# Altium PCB L293D.PcbDoc
Units mm, origin at the board's own origin, x right, y up, seen from the top; angles counter-clockwise.
Board outline 50 x 43 mm, 2 copper layers (Top Layer, Bottom Layer); 8 components, 10 nets, 34 pads, 1 vias.
Unrouted connection lines stored in the file: 3.
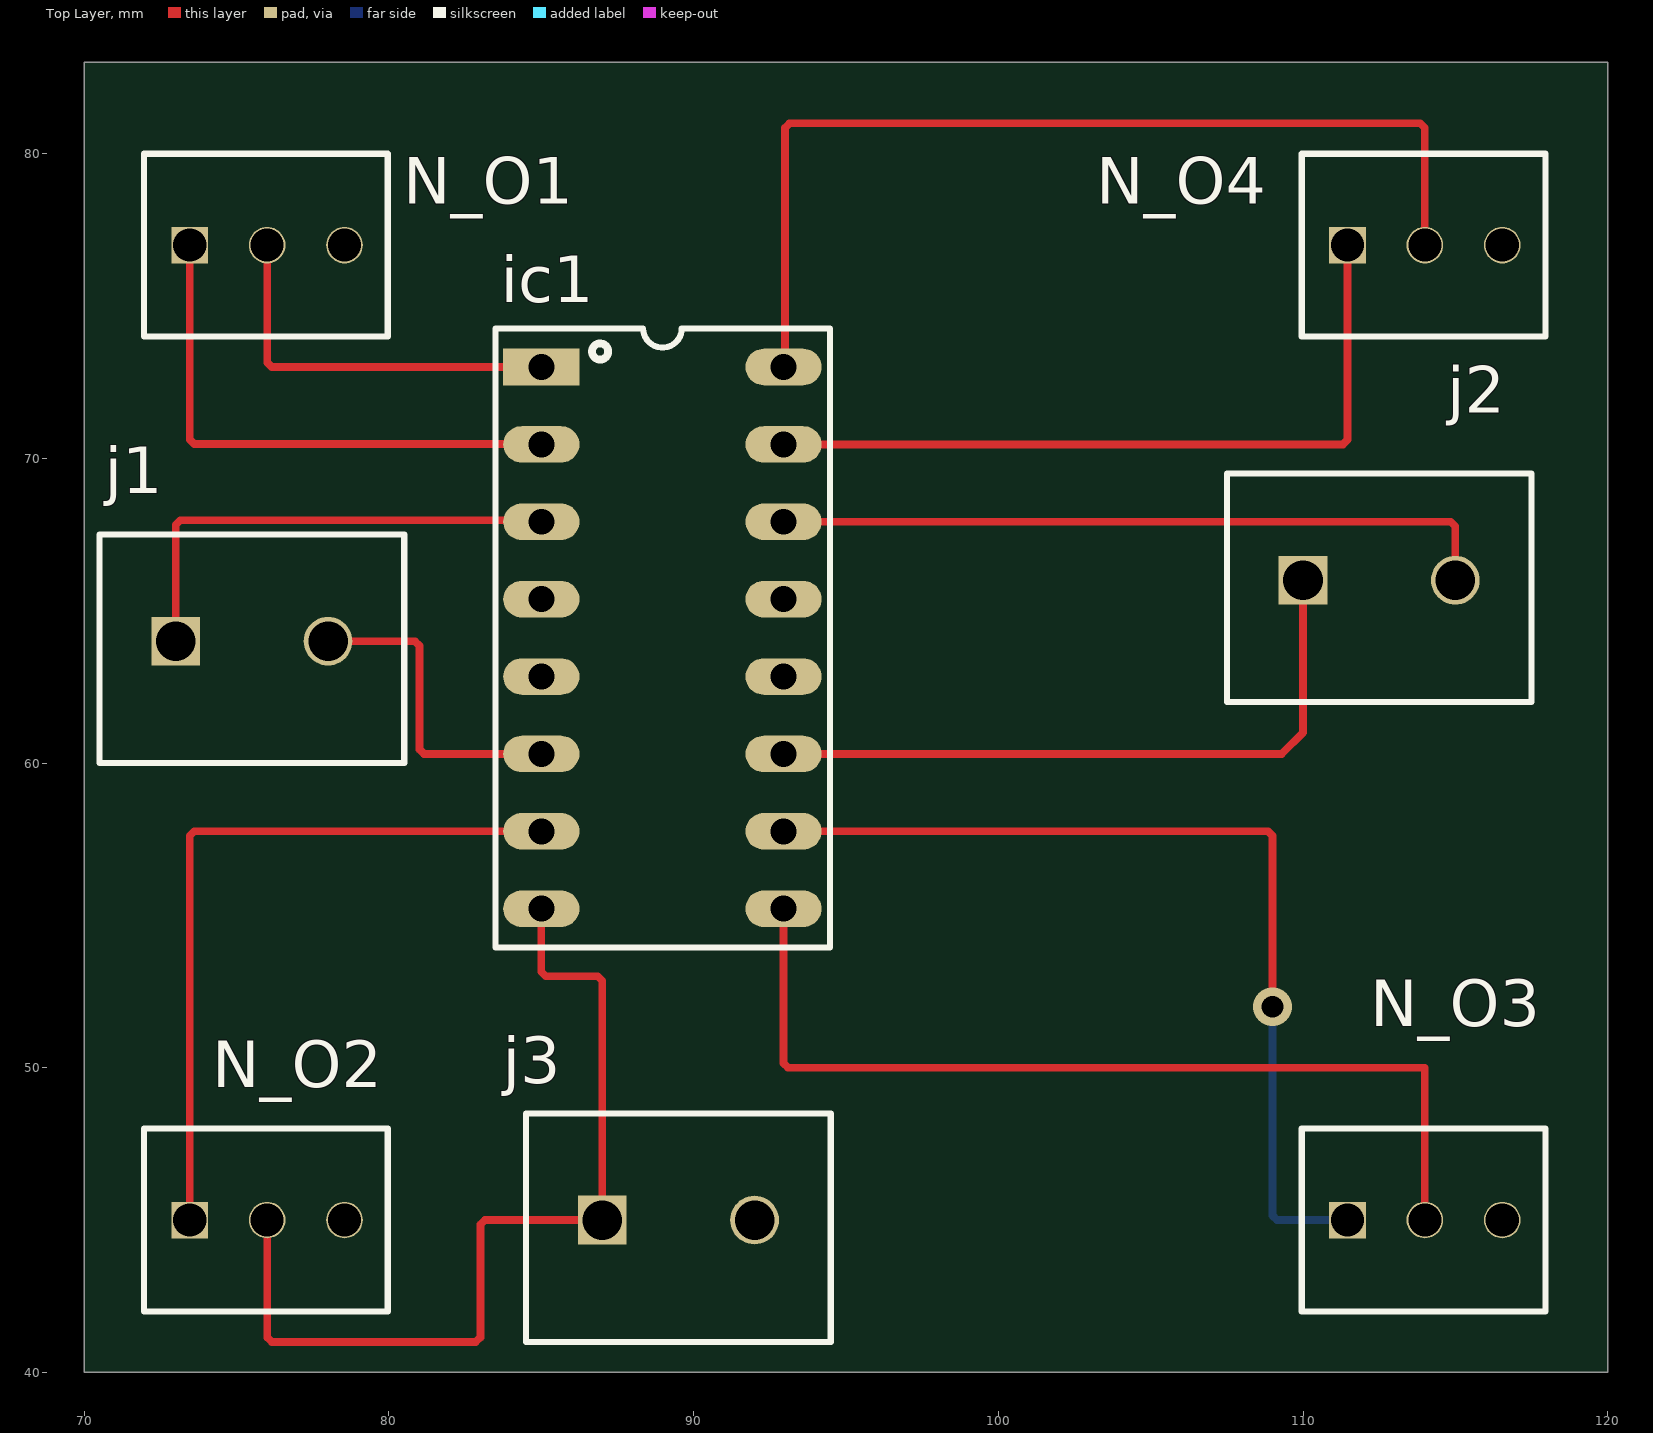
[diagram p0: Top Layer view]
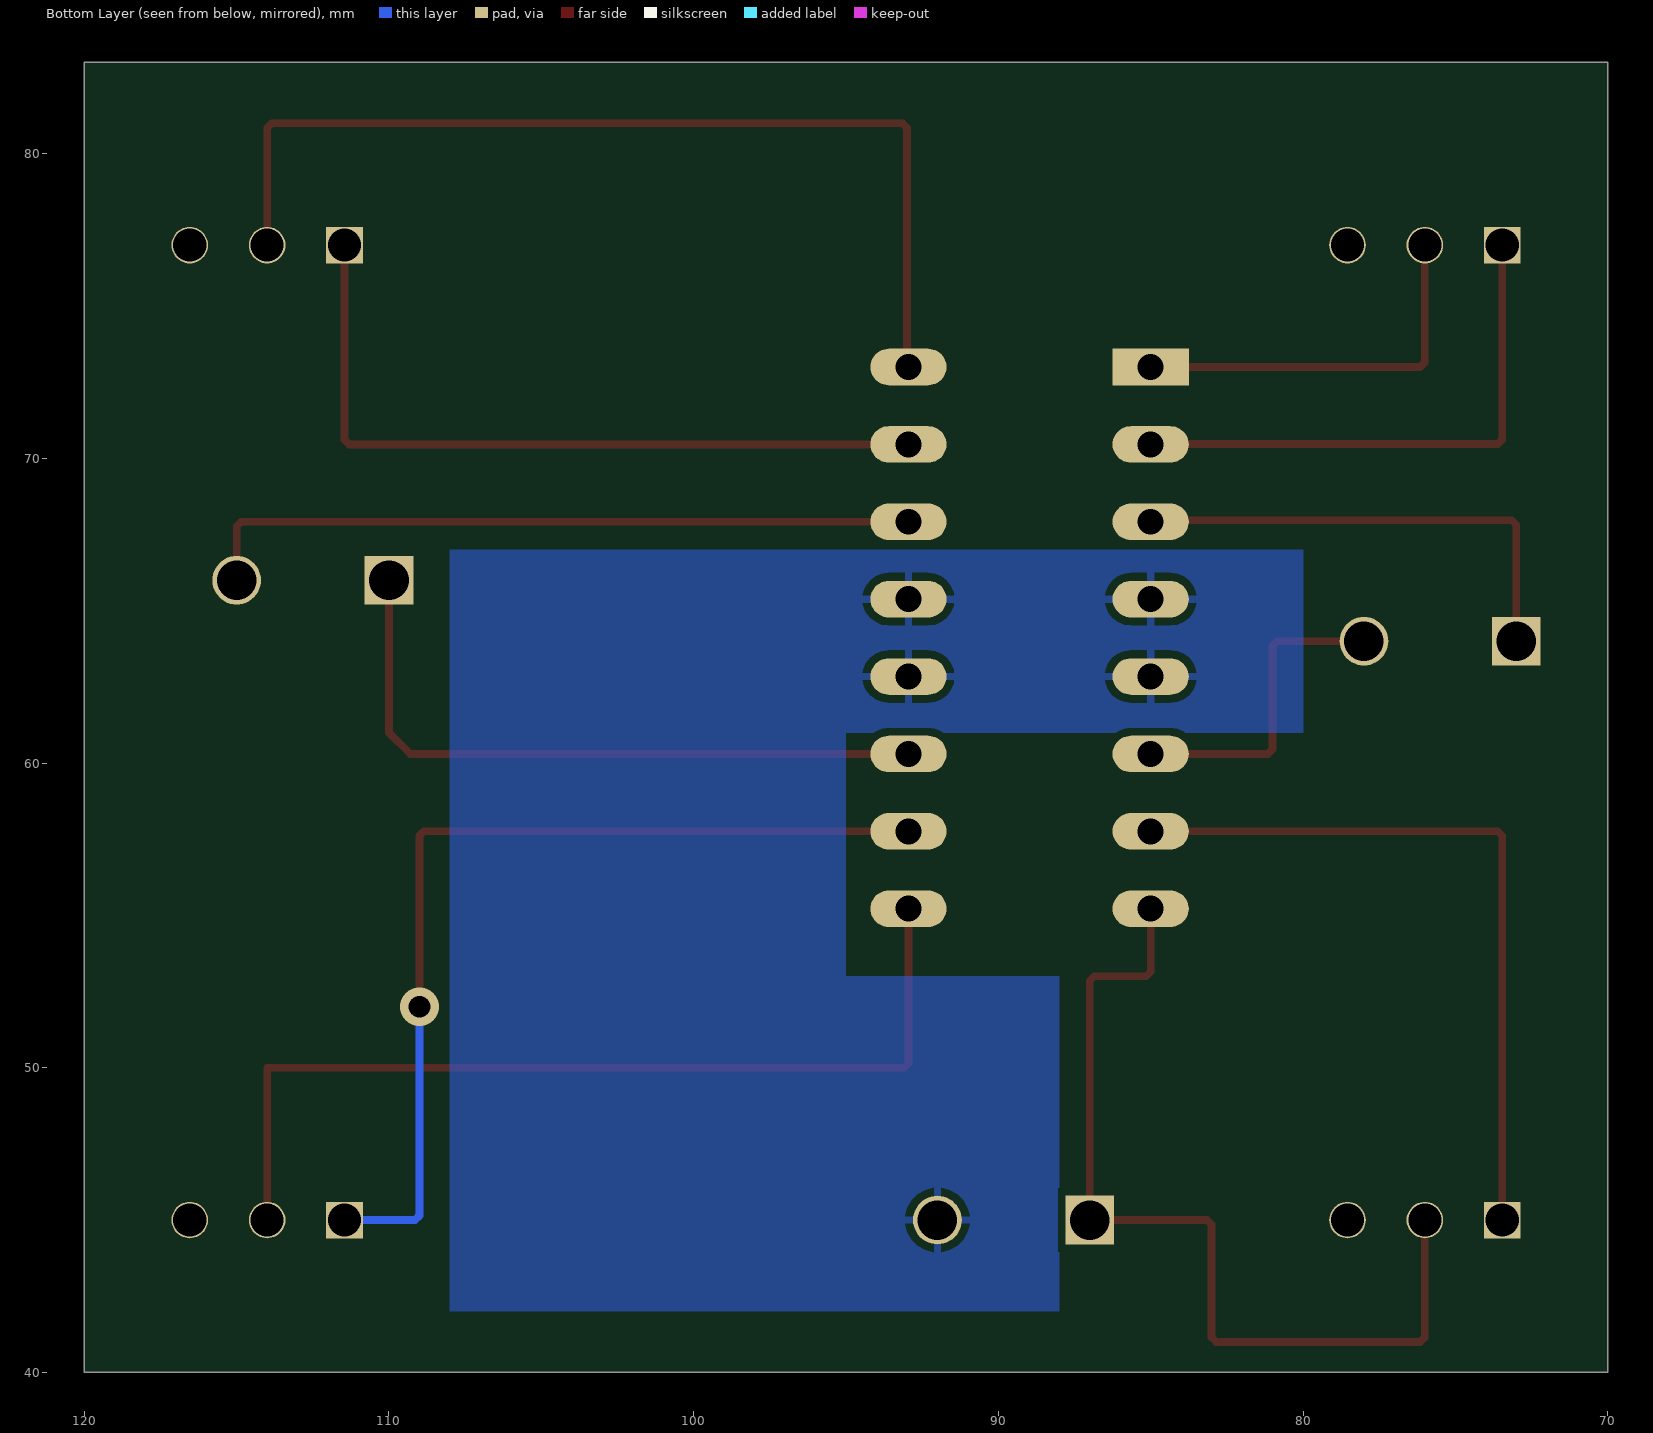
[diagram p1: Bottom Layer view, seen from below]
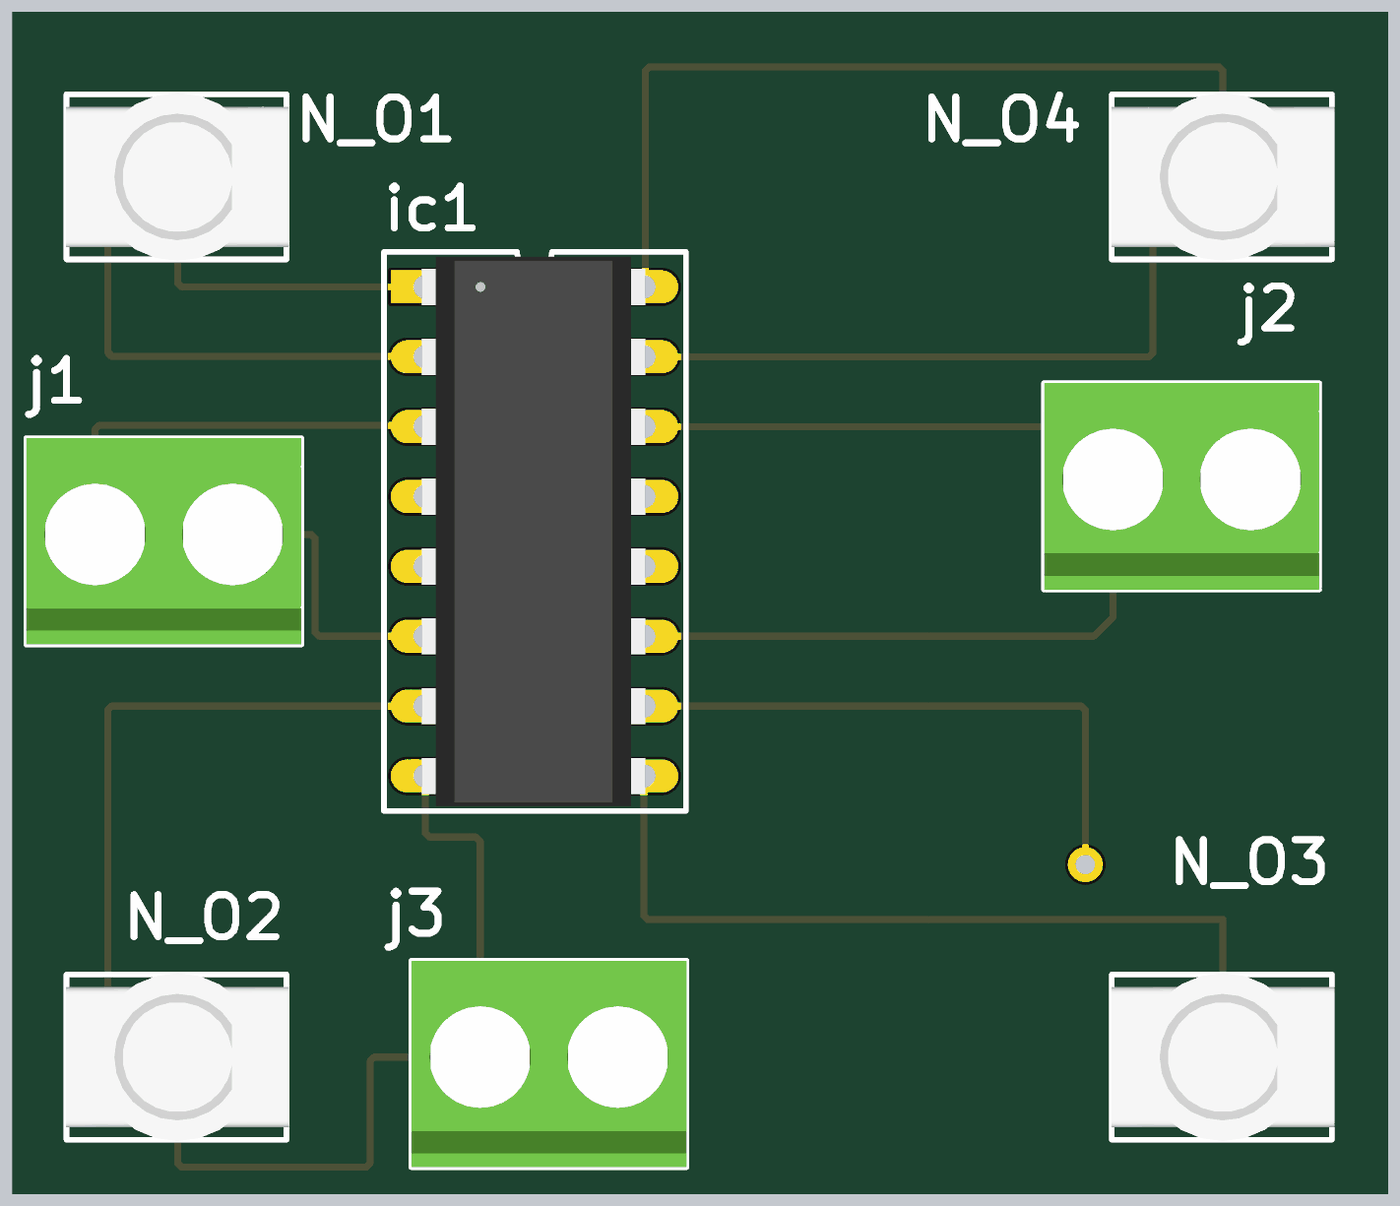
[diagram p2: 3D render of the assembled board from above, using the file's embedded part models]

## Layer stack, top to bottom
Top Solder: solder mask 0.0102, Solder Resist, Dk 3.5
Top Layer: signal copper 0.0356
Dielectric 1: dielectric 0.32, FR-4, Dk 4.8
Bottom Layer: signal copper 0.0356
Bottom Solder: solder mask 0.0102, Solder Resist, Dk 3.5

## Board outline
70,83 120,83 120,40 70,40

## Design rules (kind name [scope] priority, off if disabled: settings)
Clearance [All] p1: gap=0.254 ignorepadtopadclearanceinfootprint=FALSE
PolygonConnect [All] p1: connectstyle=Relief reliefconductorwidth=0.254 reliefentries=4 polygonreliefangle="90 Angle" airgapwidth=0.254
RoutingVias [All] p1: holewidth=0.711 width=1.27 viastyle="Through Hole" minholewidth=0.711 minwidth=1.27 maxholewidth=0.711 maxwidth=1.27
SolderMaskExpansion [All] p1: expansion=0.102 istentingtop=FALSE
SupplyNets "Schematic Supply Nets" [InNet('GND')] p1: voltage=0.000
Width [All] p1: maxlimit=0.254 minlimit=0.254 preferedwidth=0.254
30 further rules are at their usual default settings.

## Components (designator, comment, footprint, x,y, rotation, side; value= is the part's Value field where it differs from the comment)
ic1 "L293D" L293D 85,73 r0 top
j1 "terminal" terminal 73,64 r0 top
j2 "terminal" terminal 110,66 r0 top
j3 "terminal" terminal 87,45 r0 top
N_O1 "push" PUSH_BUTTON 73.46,77 r0 top
N_O2 "push" PUSH_BUTTON 73.46,45 r0 top
N_O3 "push" PUSH_BUTTON 111.46,45 r0 top
N_O4 "push" PUSH_BUTTON 111.46,77 r0 top

## Footprints (in the part's own frame and the unit in brackets; to place one, negate y for a bottom-side part, rotate by r counter-clockwise, add the part's x,y. Pads: shape width x height; smd on the part's side, far side on the other; paste and mask are expansions set on the pad)
L293D [mm]
  rect 2.5x1.2 hole 0.85: 1(0,0)
  oval 2.5x1.2 hole 0.85: 2(0,-2.54) 3(0,-5.08) 4(0,-7.62) 5(0,-10.16) 6(0,-12.7) 7(0,-15.24) 8(0,-17.78) 9(7.95,-17.78) 10(7.95,-15.24) 11(7.95,-12.7) 12(7.95,-10.16) 13(7.95,-7.62) 14(7.95,-5.08) 15(7.95,-2.54) 16(7.95,0)
  silkscreen extent -1.5,-19.05 9.47,1.27, body extent -0.13,-18.88 8,1.1, height 5.24
PUSH_BUTTON [mm]
  rect 1.2x1.2 hole 1.09: 1(0,0)
  round 1.2 hole 1.09: 2(2.54,0) 3(5.08,0)
  silkscreen extent -1.5,-3 6.5,3, body extent -1.51,-3.05 6.59,3.05, height 18.94
terminal [mm]
  rect 1.6x1.6 hole 1.3: 1(0,0)
  round 1.6 hole 1.3: 2(5,0)
  silkscreen extent -2.5,-4 7.5,3.5, body extent -2.5,-4 7.5,3.5, height 11.5

## Part data
ic1: "Half Bridge Based Peripheral Driver, 1.2A, PDIP16", Case/Package=DIP, Manufacturer=STMicroelectronics, Max Supply Voltage=36V, Min Supply Voltage=4.5V, Nominal Supply Voltage=5V, Output Current Flow Direction="SOURCE AND SINK", Output Peak Current Limit-Nom=1.2A, Package Body Material=Plastic, Package Shape=Rectangular, Package Style=IN-LINEMeter, Supplier Part Number=2116481, Supply Voltage1-Nom=24V, Built-in Protections=TRANSIENT,THERMAL, Category="Motor Drivers", Channels=2, ComponentLink1Description=https://datasheet.ciiva.com:443/pdfs/VipMasterIC/IC/SGST/SGSTS19357/SGSTS19357-1.pdf?src-supplier=IHS+Markit, ComponentLink1URL=https://datasheet.ciiva.com:443/pdfs/VipMasterIC/IC/SGST/SGSTS19357/SGSTS19357-1.pdf?src-supplier=IHS+Markit, ComponentLink2Description=https://datasheet.ciiva.com/14150/ocl293d-647107-dat-en-14150297.pdf?src-supplier=Distrelec, ComponentLink2URL=https://datasheet.ciiva.com/14150/ocl293d-647107-dat-en-14150297.pdf?src-supplier=Distrelec, ComponentLink3Description=https://datasheet.ciiva.com/29307/156134-da-01-en-4-kanal-treiber-ic-l293d-stm-29307000.pdf?src-supplier=Conrad, ComponentLink3URL=https://datasheet.ciiva.com/29307/156134-da-01-en-4-kanal-treiber-ic-l293d-stm-29307000.pdf?src-supplier=Conrad, ComponentLink4Description=https://datasheet.ciiva.com/1955/cd00000059-1955400.pdf?src-supplier=Digikey, ComponentLink4URL=https://datasheet.ciiva.com/1955/cd00000059-1955400.pdf?src-supplier=Digikey, ComponentLink5Description=https://datasheet.ciiva.com/4895/cd00000059-4895945.pdf?src-supplier=Mouser, ComponentLink5URL=https://datasheet.ciiva.com/4895/cd00000059-4895945.pdf?src-supplier=Mouser, ComponentLink6Description=https://datasheet.ciiva.com/16458/cd00000059-16458220.pdf?src-supplier=Future+Electronics, ComponentLink6URL=https://datasheet.ciiva.com/16458/cd00000059-16458220.pdf?src-supplier=Future+Electronics, Height - Seated (Max)=5.1mm, Input Characteristics=STANDARD, Interface IC Type="HALF BRIDGE BASED PERIPHERAL DRIVER", JESD-30 Code=R-PDIP-T16, JESD-609 Code=e3, Length=20mm, Manufacturer Part Number=L293D, Output Characteristics=3-STATE, Output Polarity=True, Pins=16, Pricing="25=4.14, 100=4.02, 375=3.9, 625=3.85, 1250=3.71 (USD)", Qualification Status="Not Qualified", Reach SVHC Compliant=No, RoHS=Yes, RoHS Compliant=Yes, Stock=1325, Supplier="Future Electronics", Supply Voltage1-Max=36V, Supply Voltage1-Min=4.5V, Surface Mount=No, Terminal Finish=Tin, Terminal Form="Through Hole", Terminal Pitch=2.54mm, Terminal Position=DUAL, Width=7.62mm
j1 j2 j3: library part 691137710002, "Barrier Strip Terminal Block", Manufacturer="Wurth Electronics", Supplier Part Number=1769908, Category="Terminal Blocks", ComponentLink1Description=https://datasheet.ciiva.com:443/pdfs/VipMasterIC/IC/MIDC/MIDC-S-A0005074262/MIDC-S-A0004711666-1.pdf?src-supplier=IHS+Markit, ComponentLink1URL=https://datasheet.ciiva.com:443/pdfs/VipMasterIC/IC/MIDC/MIDC-S-A0005074262/MIDC-S-A0004711666-1.pdf?src-supplier=IHS+Markit, ComponentLink2Description=https://katalog.we-online.de/em/datasheet/691137710002.pdf?src-supplier=Digikey, ComponentLink2URL=https://katalog.we-online.de/em/datasheet/691137710002.pdf?src-supplier=Digikey, Manufacturer Part Number=691137710002, Pricing="500=0.218, 1000=0.202, 2500=0.189 (GBP)", RoHS=No, RoHS Compliant=Yes, Stock=355, Supplier=Rs
N_O1 N_O2 N_O3 N_O4: library part 800CSP1B6M2QE, "Pushbutton Switch", Manufacturer=E-Switch, Supplier Part Number=EG5543-ND, Category="Pushbutton Switches", ComponentLink1Description=https://www.e-switch.com/system/asset/product_line/data_sheet/214/800C.pdf?src-supplier=Digikey, ComponentLink1URL=https://www.e-switch.com/system/asset/product_line/data_sheet/214/800C.pdf?src-supplier=Digikey, Manufacturer Part Number=800CSP1B6M2QE, Pricing="1=2.89, 10=2.582, 25=2.446, 50=2.3596, 100=2.2361, 270=2.175 (USD)", Reach SVHC Compliant=Yes, RoHS=No, Stock=192, Supplier=Digikey

## Via types
v1: diameter 1.27, hole 0.711, Top Layer to Bottom Layer, 1 vias

## Nets (pads, with @x,y where several pads share a name; then routed paths per layer and width w, separated by ;. In a path a pad name is that pad's centre, name@x,y a point inside that pad or via, vN(x,y) a via of type N, cw(c..) or ccw(c..) an arc to the next point about the centre after c; other vN are vias at no path point)
GND: ic1.4 ic1.5 ic1.12 ic1.13 j3.2
Netic1_1: ic1.1 ic1.8 ic1.9 ic1.16 j3.1 N_O1.2 N_O2.2 N_O3.2 N_O4.2 | length 108.1
  Top Layer w0.254: N_O2.2@76,45.396 76,41.149 76.149,41 82.851,41 83,41.149 83,44.851 83.149,45 j3.1 87,52.851 86.851,53 85.149,53 85,53.149 ic1.8 ; N_O1.2 76,73.149 76.149,73 ic1.1 ; ic1.9 92.95,50.149 93.099,50 114,50 N_O3.2 ; ic1.16 93,73.05 93,80.851 93.149,81 113.851,81 114,80.851 N_O4.2
Netic1_2: ic1.2 N_O1.1 | length 18
  Top Layer w0.254: N_O1.1 73.46,70.621 73.609,70.472 ic1.2@85,70.472
Netic1_3: ic1.3 j1.1 | length 15.9
  Top Layer w0.254: j1.1 73,67.82 73.149,67.969 84.951,67.969 ic1.3
Netic1_6: ic1.6 j1.2 | length 10.5
  Top Layer w0.254: j1.2 80.851,64 81,63.851 81,60.449 81.149,60.3 ic1.6
Netic1_7: ic1.7 N_O2.1 | length 24.2
  Top Layer w0.254: N_O2.1 73.46,57.611 73.609,57.76 ic1.7
Netic1_10: ic1.10 N_O3.1 | length 31.1
  Top Layer w0.254: ic1.10 108.851,57.76 109,57.611 v1(109,52)
  Bottom Layer w0.254: v1(109,52) 109,45.149 109.149,45 N_O3.1
Netic1_11: ic1.11 j2.1 | length 22.3
  Top Layer w0.254: ic1.11 109.3,60.3 110,61 j2.1
Netic1_14: ic1.14 j2.2 | length 23.9
  Top Layer w0.254: ic1.14 114.851,67.92 115,67.771 j2.2
Netic1_15: ic1.15 N_O4.1 | length 25
  Top Layer w0.254: ic1.15 111.311,70.46 111.46,70.609 N_O4.1
pads on no net: N_O1.3 N_O2.3 N_O3.3 N_O4.3

## Polygon pours and split planes (outlines as drawn)
GND on Bottom Layer "GND_L02_P000" (solid, pour order 0): 108,42 88,42 88,53 95,53 95,61 80,61 80,67 108,67